# Altium PCB GRHV_Double_30v.PcbDoc
Units mil, origin at the board's own origin, x right, y up, seen from the top; angles counter-clockwise.
Board outline 4600 x 3780 mil, 2 copper layers (Top Layer, Bottom Layer); 83 components, 43 nets, 212 pads, 0 vias.
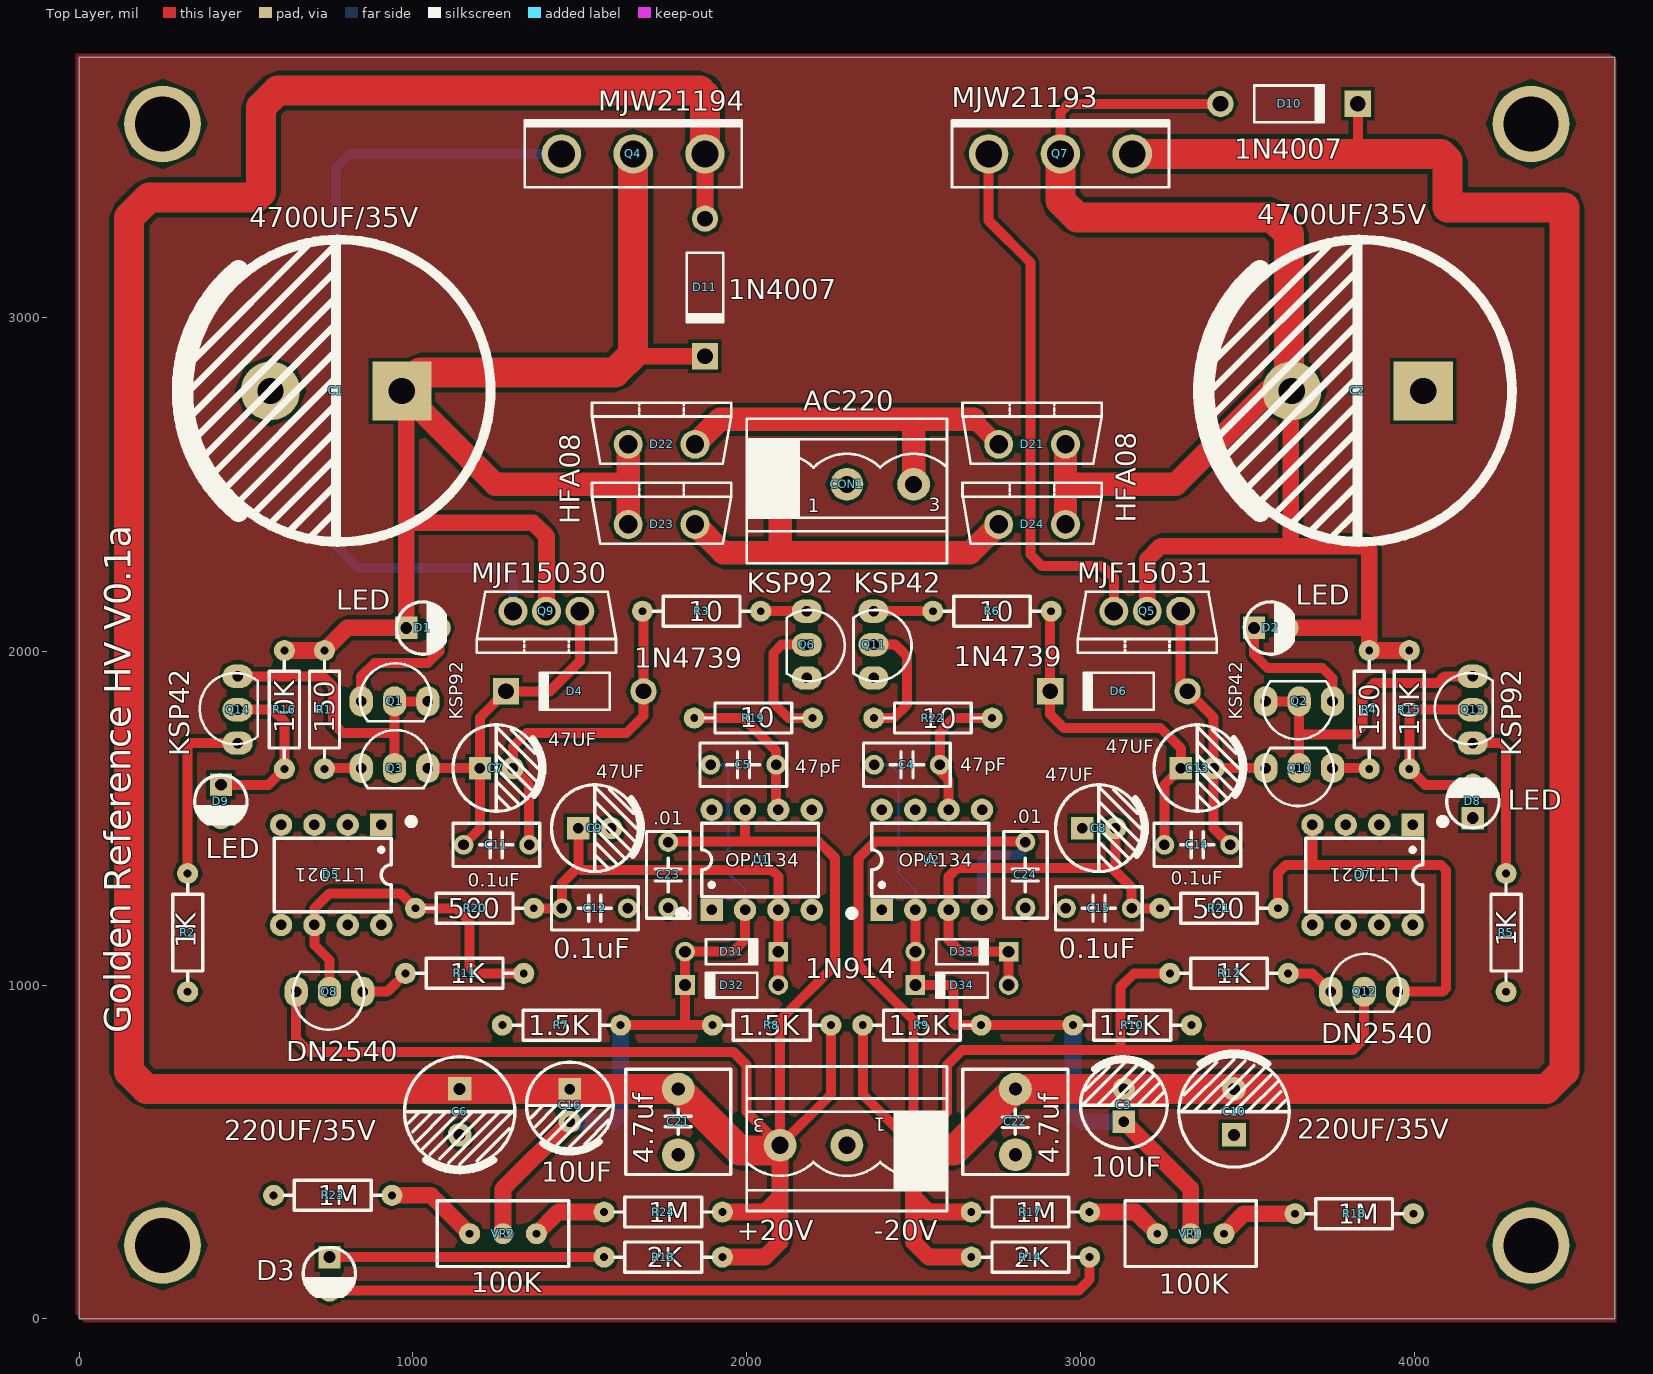
[diagram p0: Top Layer view]
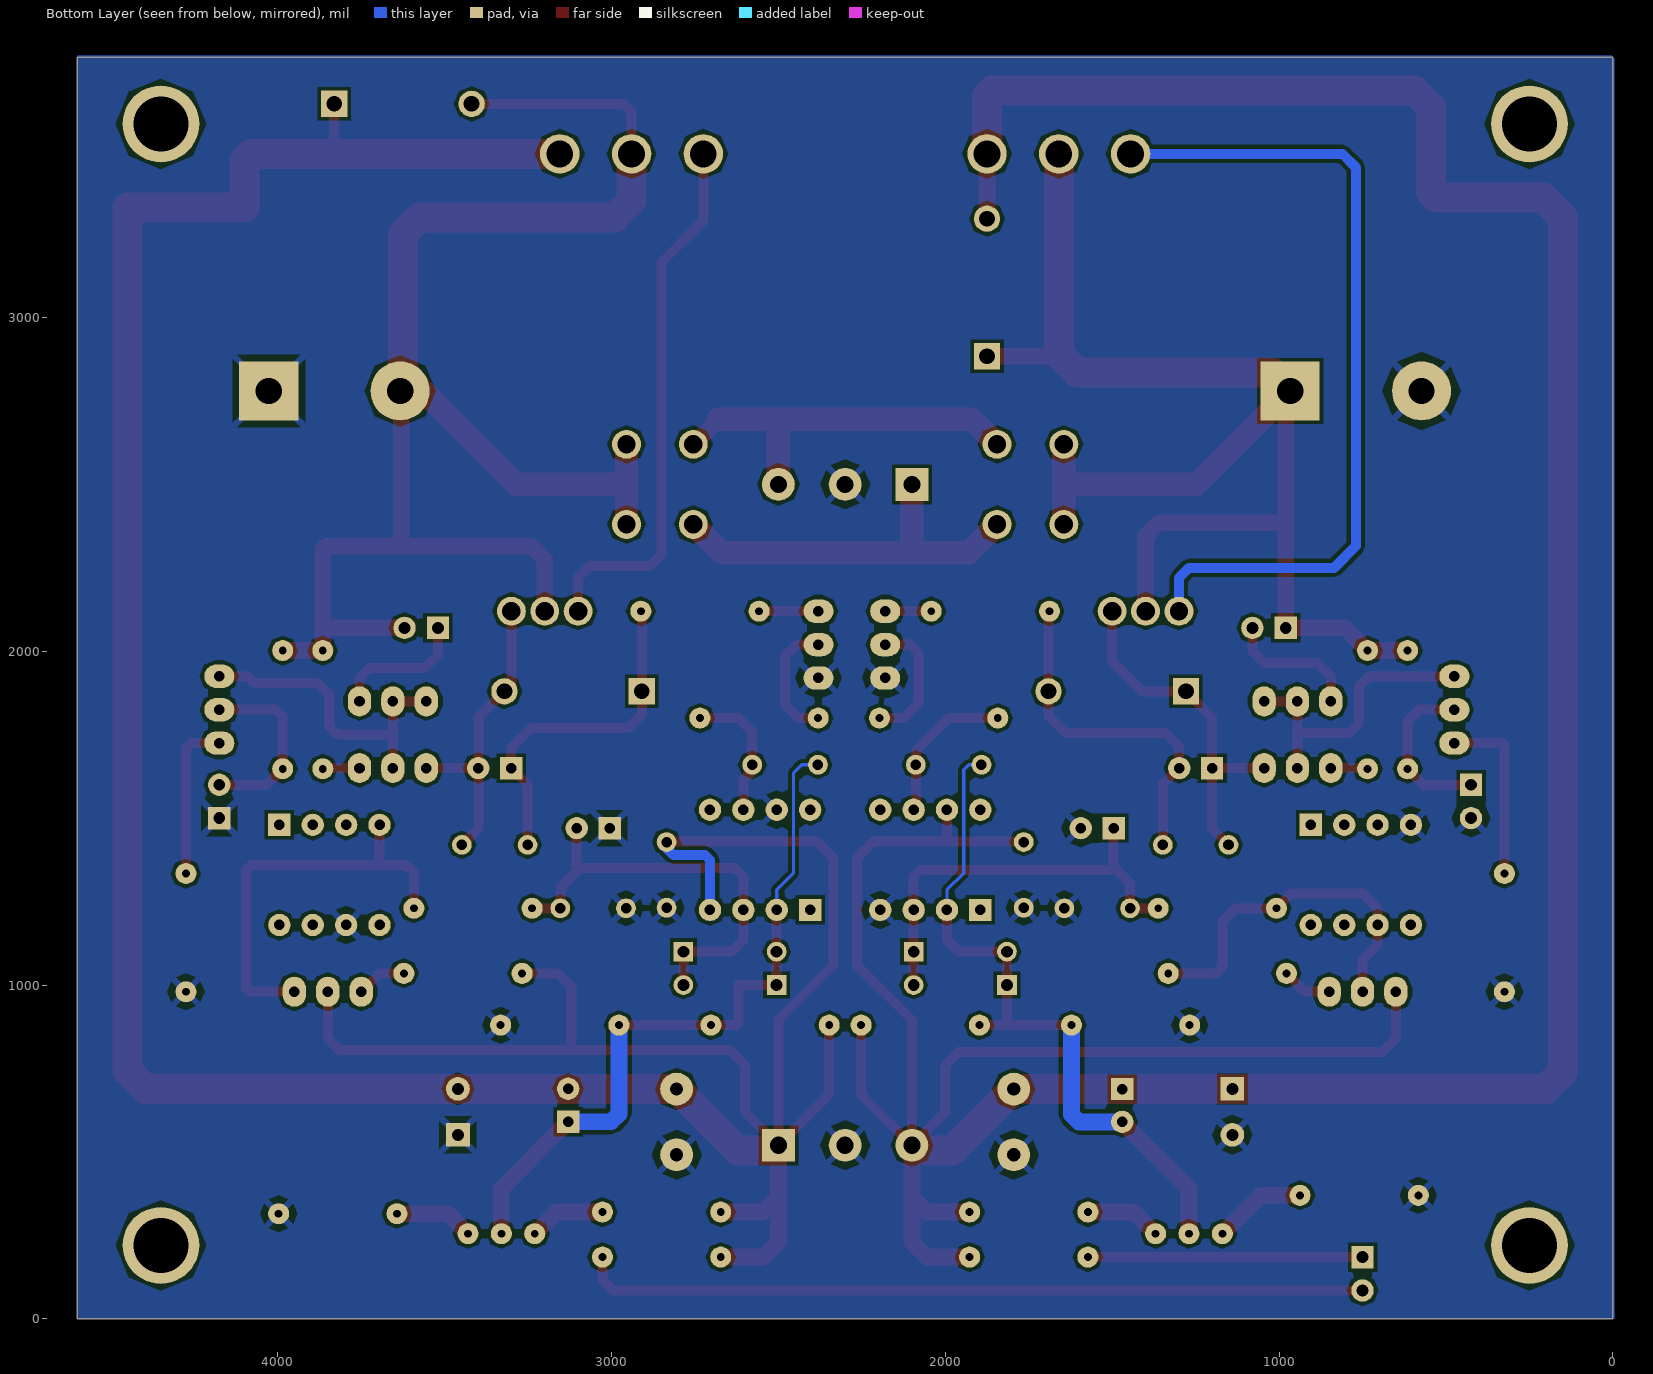
[diagram p1: Bottom Layer view, seen from below]

## Layer stack, top to bottom
Top Solder: solder mask 0.4, Solder Resist, Dk 3.5
Top Layer: signal copper 1.4
Dielectric 1: dielectric 12.6, FR-4, Dk 4.8
Bottom Layer: signal copper 1.4
Bottom Solder: solder mask 0.4, Solder Resist, Dk 3.5

## Board outline
0,0 4600,0 4600,3780 0,3780

## Design rules (kind name [scope] priority, off if disabled: settings)
Clearance [All] p1: gap=10 ignorepadtopadclearanceinfootprint=FALSE except(0: Arc-Hole Track-Hole SMDPad-Hole THPad-Hole Via-Hole Fill-Hole Poly-Hole Region-Hole Text-Hole)
PlaneClearance [All] p1: clearance=30
PlaneConnect [All] p1: planeconnectstyle=Relief reliefexpansion=20 reliefentries=4 reliefconductorwidth=20 reliefairgap=30
PolygonConnect [All] p1: thpad.connectstyle=Relief thpad.reliefconductorwidth=20 thpad.reliefentries=4 thpad.polygonreliefangle="45 Angle" thpad.airgapwidth=20 smdpad.connectstyle=Relief smdpad.reliefconductorwidth=20 smdpad.reliefentries=4 smdpad.polygonreliefangle="90 Angle" smdpad.airgapwidth=20 via.connectstyle=Relief via.reliefconductorwidth=20 via.reliefentries=4 via.polygonreliefangle="45 Angle" via.airgapwidth=20
RoomDefinition GRHV_double_30v [InComponentClass('GRHV_double_30v')] p1: confinementstyle=ConfineIn formatcopy=TRUE lockcomponents=FALSE outline 5480,-80 25630,-80 25630,970 5480,970
RoutingVias [All] p1: holewidth=28 width=50 viastyle="Through Hole" minholewidth=28 minwidth=50 maxholewidth=28 maxwidth=50
SolderMaskExpansion [All] p1: expansion=4
Width [All] p1: maxlimit=100 minlimit=10 preferedwidth=90
28 further rules are at their usual default settings.

## Components (designator, comment, footprint, x,y, rotation, side; value= is the part's Value field where it differs from the comment)
-20V "+20V" HX5.08-3L 2500,520 r180 top (schematic designator CON2)
C1 "4700UF/35V" "CAP 10*22*40" 770,2780 r180 top
C2 "4700UF/35V" "CAP 10*22*40" 3830,2780 r180 top
C3 "10UF" "CAP 2.5*6.3*7" 3130,640 r90 top
C4 "47pF" "CBB 6.3*6.3*5" 2480,1660 r180 top
C5 "47pF" "CBB 6.3*6.3*5" 1990,1660 r180 top
C6 "220UF/35V" "CAP 3.5*8*11.5" 1140,620 r270 top
C7 "47UF" "CAP 2.5*6.3*11.2" 1250,1650 r0 top
C8 "47UF" "CAP 2.5*6.3*11.2" 3055,1470 r0 top
C9 "47UF" "CAP 2.5*6.3*11.2" 1545,1470 r0 top
C10 "220UF/35V" "CAP 3.5*8*11.5" 3460,620 r90 top
C11 "0.1uF" "CBB 6.3*6.3*5" 1250,1420 r0 top
C12 "0.1uF" "CBB 6.3*6.3*5" 1545,1230 r0 top
C13 "47UF" "CAP 2.5*6.3*11.2" 3350,1650 r0 top
C14 "0.1uF" "CBB 6.3*6.3*5" 3350,1420 r0 top
C15 "0.1uF" "CBB 6.3*6.3*5" 3055,1230 r180 top
C16 "10UF" "CAP 2.5*6.3*7" 1470,639.21 r270 top
C21 "4.7uf" "CBB 7.2*7.2*13" 1795,590 r270 top
C22 "4.7uf" "CBB 7.2*7.2*13" 2805,590 r90 top
C23 ".01" "CBB 6.3*6.3*5" 1765,1330 r90 top value=0.01uF
C24 ".01" "CBB 6.3*6.3*5" 2835,1330 r90 top value=0.01uF
CON1 "AC220" HX5.08-3L 2100,2500 r0 top
D1 "LED" "LED 3MM-R" 1030,2070 r0 top
D2 "LED" "LED 3MM-R" 3570,2070 r0 top
D3 "ValueValueAux" "LED 3MM-R" 750,135 r270 top
D4 "1N4739" DO-41 1485,1880 r180 top
D5 "LT1021" DIP8-300_MH 755,1330 r270 top
D6 "1N4739" DO-41 3115,1880 r180 top
D7 "LT1021" DIP8-300_MH 3845,1330 r270 top
D8 "LED" "LED 3MM-R" 4175,1550 r90 top
D9 "LED" "LED 3MM-R" 425,1550 r270 top
D10 "1N4007" DO-41 3625,3640 r0 top
D11 "1N4007" DO-41 1875,3090 r270 top
D21 "HFA08" TO220AC 2755,2620 r0 top
D22 "HFA08" TO220AC 1645,2620 r0 top
D23 "HFA08" TO220AC 1645,2380 r0 top
D24 "HFA08" TO220AC 2755,2380 r0 top
D31 "1N914" DO-35 1955,1100 r0 top
D32 "1N914" DO-35 1955,1000 r180 top
D33 "1N914" DO-35 2645,1100 r0 top
D34 "1N914" DO-35 2645,1000 r180 top
Q1 "KSP92" TO92A 845,1850 r90 top
Q2 "KSP42" TO92A 3755,1850 r270 top
Q3 "KSP92" TO92A 845,1650 r90 top
Q4 "MJW21194" TO247V 1445,3490 r0 top
Q5 "MJF15031" TO220V 3300,2120 r180 top
Q6 "KSP92" TO92A 2180,2120 r0 top
Q7 "MJW21193" TO247V 2725,3490 r0 top
Q8 "DN2540" TO92A 850,980 r270 top
Q9 "MJF15030" TO220V 1500,2120 r180 top
Q10 "KSP42" TO92A 3755,1650 r270 top
Q11 "KSP42" TO92A 2380,2120 r0 top
Q12 "DN2540" TO92A 3750,980 r90 top
Q13 "KSP92" TO92A 4175,1725 r180 top
Q14 "KSP42" TO92A 475,1725 r180 top
R1 "150" "RS 1/4W" 735,1825 r270 top
R2 "1K" "RS 1/4W" 325,1157 r270 top
R3 "10" "RS 1/4W" 1865,2120 r0 top
R4 "150" "RS 1/4W" 3865,1825 r90 top
R5 "1K" "RS 1/4W" 4275,1157 r90 top
R6 "10" "RS 1/4W" 2735,2120 r0 top
R7 "1.5K" "RS 1/4W" 1445,880 r180 top
R8 "1.5K" "RS 1/4W" 2075,880 r180 top
R9 "1.5K" "RS 1/4W" 2525,880 r180 top
R10 "1.5K" "RS 1/4W" 3155,880 r180 top
R11 "1K" "RS 1/4W" 1155,1035 r0 top
R12 "1K" "RS 1/4W" 3445,1035 r180 top
R13 "2K" "RS 1/4W" 1750,185 r0 top
R14 "2K" "RS 1/4W" 2850,185 r180 top
R15 "10K" "RS 1/4W" 3985,1825 r90 top
R16 "10K" "RS 1/4W" 615,1825 r270 top
R17 "1M" "RS 1/4W" 2850,320 r180 top
R18 "1M" "RS 1/4W" 3820,315 r180 top
R19 "10" "RS 1/4W" 2020,1800 r180 top
R20 "500" "RS 1/4W" 1185,1230 r180 top
R21 "500" "RS 1/4W" 3415,1230 r0 top
R22 "10" "RS 1/4W" 2558,1800 r0 top
R23 "1M" "RS 1/4W" 760,370 r180 top
R24 "1M" "RS 1/4W" 1750,320 r180 top
U1 "OPA134" DIP8-300_MH 2045,1375 r90 top
U2 "OPA134" DIP8-300_MH 2555,1375 r90 top
VR1 "100K" "RS 1/2W-VR" 3330,255 r180 top
VR2 "100K" "RS 1/2W-VR" 1270,255 r180 top

## Footprints (in the part's own frame and the unit in brackets; to place one, negate y for a bottom-side part, rotate by r counter-clockwise, add the part's x,y. Pads: shape width x height; smd on the part's side, far side on the other; paste and mask are expansions set on the pad)
"CAP 2.5*6.3*7" [mm] "脚距2.5mm直径6.3mm高度7mm"
  rect 1.7x1.7 hole 0.8: 1(-1.25,0)
  round 1.7 hole 0.8: 2(1.25,0)
  silkscreen extent -3.3,-3.3 3.56,3.3, body extent -3.15,-3.15 3.16,3.15, height 7.03
"CAP 2.5*6.3*11.2" [mm] "脚距2.5mm直径6.3mm高度11.2mm"
  rect 1.7x1.7 hole 0.8: 1(-1.25,0)
  round 1.7 hole 0.8: 2(1.25,0)
  silkscreen extent -3.3,-3.3 3.56,3.3, body extent -3.15,-3.15 3.16,3.15, height 11.23
"CAP 3.5*8*11.5" [mm] "脚距3.5mm直径8mm高度11.5mm"
  rect 1.8x1.8 hole 0.9: 1(-1.75,0)
  round 1.8 hole 0.9: 2(1.75,0)
  silkscreen extent -4.2,-4.2 4.5,4.2, body extent -4,-4 4.01,4, height 11.53
"CAP 10*22*40" [mm] "脚距10mm直径22mm高度40mm"
  rect 4.5x4.5 hole 2: 1(-5,0)
  round 4.5 hole 2: 2(5,0)
  silkscreen extent -11.75,-11.51 11.74,11.49, body extent -11,-11 11.01,11, height 40.03
"CBB 6.3*6.3*5" [mm] "脚距5mm高6.3mm厚3mm"
  round 1.5 hole 0.8: 1(-2.5,0) 2(2.5,0)
  silkscreen extent -3.3,-1.65 3.3,1.65, body extent -3.15,-1.5 3.15,1.5, height 6.8
"CBB 7.2*7.2*13" [mm] "脚距5mm高13mm厚7.2mm"
  round 2.5 hole 1: 1(-2.5,0) 2(2.5,0)
  silkscreen extent -4,-4 4,4, body extent -4,-4 4,4, height 17.53
DIP8-300_MH [mm] "带底座 9.4*7.6*3.8(长宽高）"
  rect 1.7x1.7 hole 0.8: 1(-3.81,3.81)
  round 1.7 hole 0.8: 2(-3.81,1.27) 3(-3.81,-1.27) 4(-3.81,-3.81) 5(3.81,-3.81) 6(3.81,-1.27) 7(3.81,1.27) 8(3.81,3.81)
  silkscreen extent -4.32,-4.32 2.79,6.35, body extent -5,-5.19 5,5.19, height 7.7
DO-35 [mm] "Diode, Axial; Body 3.8 x 1.9 mm (LxDia. max), Lead Dia. 0.53 mm (max)"
  round 1.5 hole 0.9: 1(-3.55,0)
  rect 1.5x1.5 hole 0.9: 2(3.55,0)
  silkscreen extent -1.95,-0.95 2.05,0.95
DO-41 [mm] "Diode, Axial; Body 5.2 x 2.7 mm (LxDia. max), Lead Dia. 0.86 mm (max)"
  round 2 hole 1.2: 1(-5.23,0)
  rect 2x2 hole 1.2: 2(5.23,0)
  silkscreen extent -2.65,-1.4 2.75,1.4
HX5.08-3L [mm]
  rect 2.5x2.5 hole 1.3: 1(0,0)
  round 2.5 hole 1.3: 2(5.08,0) 3(10.16,0)
  silkscreen extent -2.54,-6 12.7,5, body extent -2.5,-5.5 12.5,2.5, height 11
"LED 3MM-R" [mm] "红色3mm直插LED"
  rect 1.7x1.7 hole 0.9: 1(-1.27,0)
  round 1.7 hole 0.9: 2(1.27,0)
  silkscreen extent -2.01,-2 1.72,1.98, body extent -1.95,-1.95 1.64,1.95, height 5.55
"RS 1/2W-VR" [mm] "直插3脚顶调可调电阻，脚距2.54mm，长10mm*宽5mm*高10mm"
  round 1.6 hole 0.6: 1(-2.54,0) 2(2.54,0) 3(0,0)
  silkscreen extent -5,-2.5 5,2.5
"RS 1/4W" [mm] "直插色环电阻，脚距9mm，直径2.3mm"
  round 1.6 hole 0.6: 1(-4.5,0) 2(4.5,0)
  silkscreen extent -3.68,-1.14 3.68,1.14, body extent -4.72,-1.16 4.73,1.16, height 2.32
TO92A [mil]
  oval 90x70 hole 31.5: 1(0,0) 2(0,-100) 3(0,-200)
  silkscreen extent -60,-209 114,4
TO220AC [mm]
  round 2.2 hole 1.397: 1(0,0) 2(5.08,0)
  silkscreen extent -2.75,-1.48 7.83,3.17
TO220V [mm]
  round 2.2 hole 1.397: 1(0,0) 2(2.54,0) 3(5.08,0)
  silkscreen extent -2.75,-1.48 7.83,3.18
TO247V [mm]
  round 3 hole 2.032: 1(0,0) 2(5.461,0) 3(10.922,0)
  silkscreen extent -2.79,-2.54 13.72,2.54

## Part data
-20V: library part EDG5.08-3P
C1 C2 C3 C6 C7 C8 C9 C10 C13 C16: library part C-CAP, "直插电解电容", BOM名称=直插电解电容, 学习资源=www.ooocke.com, 版权归属=源创客
C4 C5 C11 C12 C14 C15 C23 C24: library part C-CBB, "CBB电容", BOM名称=CBB电容, 学习资源=www.ooocke.com, 版权归属=源创客
C21 C22: library part C-MKS, "MKS薄膜电容"
CON1: library part AC220-3
D1 D2 D8 D9: "直插式LED"
D3: library part LED, "直插式LED"
D4 D6: "9.1V/1W稳压管"
D5 D7: library part LT1021-10-2P, "10V Precision Reference 2 Pin Config"
D10 D11: "整流二极管", BOM名称=整流二极管, 学习资源=www.ooocke.com, 版权归属=源创客
D21 D22 D23 D24: library part VS-HFA08TB60-M3, "Ultrafast Soft Recovery Diado 8A 600V"
D31 D32 D33 D34: "高速开关管 1V/0.25W"
Q1 Q3 Q6 Q13: library part KSP92/93, "High Voltage PNP Transistor"
Q2 Q10 Q11 Q14: library part KSP42/43, "High Voltage NPN Transistor"
Q4 Q9: "Power NPN Transistor"
Q5 Q7: "Power PNP Transistor"
Q8 Q12: "N沟道耗尽型DMOS场效应管 400V/150ma"
R1 R2 R3 R4 R5 R6 R7 R8 R9 R10 R11 R12 R13 R14 R15 R16 R17 R18 R19 R20 R21 R22 R23 R24: library part R-CRR, "直插色环电阻", BOM名称=色环电阻, 学习资源=www.ooocke.com, 版权归属=源创客
U1 U2: library part OPA134PA
VR1 VR2: library part VR-W, "直插可调电阻-顶调"

## Free pads (board coordinates)
  round 230 hole 165: 2(250,220) 2(250,3580) 2(4350,220) 2(4350,3580)

## Nets (pads, with @x,y where several pads share a name; then routed paths per layer and width w, separated by ;. In a path a pad name is that pad's centre, name@x,y a point inside that pad or via, vN(x,y) a via of type N, cw(c..) or ccw(c..) an arc to the next point about the centre after c; other vN are vias at no path point)
GND: -20V.2 C1.2 C2.1 C6.2 C8.1 C9.2 C10.1 C12.2 C15.2 C21.2 C22.1 C23.1 C24.1 CON1.2 D5.4 D7.6 D8.1 D9.2 Q6.3 Q11.3 R2.2 R5.1 R7.2 R10.1 R18.1 R23.2 U1.4 U2.7
NetC1_1: C1.1 D1.1 D11.2 D22.1 D23.1 Q4.2 Q9.2 R1.1 R16.1 | length 4341.8
  Top Layer w50: R16.1 R1.1 802.83,2070 D1.1 980,2385 ; C1.1 980,2766.85 980,2385 ; Q9.2 1400,2345 1360,2385 980,2385 ; 1660,2890 1665.91,2884.09 D11.2
  Top Layer w70: C1.1@980,2766.85 1246.85,2500 1645,2500 ; D23.1 1645,2500 ; D22.1 1645,2500
  Top Layer w90: C1.1 1021.85,2835 1605,2835 1660,2890 Q4.2
NetC2_2: C2.2 D2.2 D10.1 D21.2 D24.2 Q5.2 Q7.2 R4.2 R15.2 | length 4961.5
  Top Layer w30: Q7.2 2940,3615 2965,3640 D10.1
  Top Layer w50: Q5.2 3200,2275 3240,2315 3630,2315 ; D2.2@3622.83,2067.17 D2.2 3865,2070 ; C2.2@3625,2788.15 3630,2783.15 3630,2780 3630,2315 ; R15.2 R4.2 3865,2070 ; 3630,2315 3855,2315 3865,2305 3865,2070
  Top Layer w70: D24.2 2955,2500 ; D21.2 2955,2500 ; C2.2@3630,2780 3565,2780 3285,2500 2955,2500
  Top Layer w90: Q7.2 2940,3350 2990,3300 3575,3300 3625,3250 C2.2@3625,2788.15
NetC3_1: C3.1 C4.2 D33.1 D34.2 R9.1 R10.2 U2.2 VR1.3 | length 2175.8
  Top Layer w30: U2.2 2505,1100.24 D33.1 D34.2 2620,1000 2620,885 2625,880 R9.1 R10.2
  Top Layer w50: C3.1 3330,390.79 VR1.3
  Bottom Layer w10: C4.2 2430,1660 2455,1635 2455,1335 2505,1285 U2.2
  Bottom Layer w50: R10.2 2977.83,613.74 3000.79,590.79 C3.1
NetC3_2: -20V.1 C3.2 C10.2 C22.2 C24.2 D10.2 Q7.3 Q12.2 R9.2 R12.2 R14.2 R17.2 U2.4 | length 11167.5
  Top Layer w30: R9.2 2347.83,672.17 -20V.1 ; C24.2 2833.43,1430 2385,1430 2335,1380 2335,1060 2500,895 -20V.1 ; R12.2 3160,1035 3120,995 3120,805 ; 3830,3490 3830.91,3490.91 D10.2 ; Q12.2 3850,840 3815,805 3120,805 ; -20V.1 2600,620 2600,760 2645,805 3120,805
  Top Layer w50: -20V.1@2525,495 2515,505 -20V.1 2500,365 ; R14.2 2545,185 2500,230 2500,365 ; R17.2 2545,320 2500,365
  Top Layer w90: -20V.1@2515,505 2621.57,505 C22.2 2805.79,689.21 C3.2 3130.31,688.9 C10.2 4396.1,688.9 4450,742.8 4450,3330 4100,3330 4100,3470 4080,3490 3830,3490 Q7.3
  Bottom Layer w30: U2.4 2705,1375 2720,1390 2815,1390 2835,1410 C24.2
NetC4_1: C4.1 R22.2 U2.6 | length 418.4
  Top Layer w30: U2.6 2605,1615 2578.43,1641.57 C4.1 2578.43,1758.43 2620,1800 R22.2
NetC5_1: C5.1 R19.2 U1.6 | length 465.7
  Top Layer w30: R19.2 1990,1800 2088.43,1701.57 C5.1 2088.43,1531.57 U1.6
NetC5_2: C5.2 C16.2 D31.1 D32.2 R7.1 R8.2 U1.2 VR2.3 | length 2127.4
  Top Layer w30: R7.1 1815,880 ; R8.2 1815,880 ; U1.2 1995,1135 1960,1100 D31.1 D32.2 1815.24,880.24 1815,880
  Top Layer w50: VR2.3 1270,390 C16.2
  Bottom Layer w10: C5.2 1930,1660 1945,1645 1945,1335 1995,1285 U1.2
  Bottom Layer w50: C16.2 1600,590 1622.17,612.17 R7.1
NetC6_1: -20V.3 C6.1 C16.1 C21.1 C23.2 D11.1 Q4.3 Q8.3 R8.1 R13.2 R24.1 U1.7 | length 11467.6
  Top Layer w30: Q8.3 650,840 690,800 1960,800 2000,760 2000,620 -20V.3 ; C23.2 1766.57,1430 1990.79,1430 ; U1.7 1995,1434.21 1990.79,1430 ; R8.1 2252.17,672.17 -20V.3 ; 1990.79,1430 2215,1430 2265,1380 2265,1060 2100,895 -20V.3
  Top Layer w50: D11.1 Q4.3 ; R13.2 2055,185 2100,230 2100,365 ; R24.1 2055,320 2100,365 ; -20V.3 2100,365
  Top Layer w90: Q4.3 1875,3665 1860,3680 595,3680 545,3630 545,3375 530,3360 210,3360 150,3300 150,740 201.1,688.9 C6.1 1469.53,688.9 C16.1 C21.1 1978.43,505 2085,505 -20V.3
NetC7_1: C7.1 C11.1 D4.2 Q3.3 Q9.1 | length 1076.8
  Top Layer w30: Q3.3 C7.1 ; C11.1 1200.79,1469.21 C7.1 ; Q9.1 1500,1970 1410,1880 D4.2 1200.79,1801.69 C7.1
NetC7_2: C7.2 C11.2 D4.1 R3.1 | length 1059.6
  Top Layer w30: C11.2 1348.43,1600.79 C7.2 1300,1650.79 1300,1715 1340,1755 1640,1755 1690.91,1805.91 D4.1 1690.91,2116.93 R3.1
NetC8_2: C8.2 C15.1 D33.2 D34.1 R21.1 U2.3 | length 1337
  Top Layer w30: D34.1 D33.2 2640,1100 2605,1135 U2.3 2605,1325 2630,1350 3095,1350 ; C8.2 3104.21,1359.21 3095,1350 ; R21.1 C15.1 3153.43,1291.57 3095,1350
NetC9_1: C9.1 C12.1 D31.2 D32.1 R20.1 U1.3 | length 1281.2
  Top Layer w30: R20.1 C12.1 1446.57,1305 1495.79,1354.21 ; C9.1 1495.79,1354.21 ; D32.1 D31.2 2095,1100.24 U1.3 2095,1325 2075,1345 1505,1345 1495.79,1354.21
NetC13_1: C13.1 C14.1 D6.2 R6.2 | length 1053.8
  Top Layer w30: R6.2 2909.09,2116.93 D6.2 2909.09,1810.91 2950,1770 3240,1770 3300.79,1709.21 C13.1 3251.57,1600.79 C14.1
NetC13_2: C13.2 C14.2 D6.1 Q5.1 Q10.3 | length 917.3
  Top Layer w30: Q5.1 3300,1900.91 D6.1 3399.21,1801.69 C13.2 ; C14.2 3399.21,1469.21 C13.2 ; Q10.3 C13.2
NetCON1_1: CON1.1 D23.2 D24.1 | length 1185.4
  Top Layer w70: D23.2 1930,2295 2100,2295 ; CON1.1 2100,2295 ; D24.1 2670,2295 2100,2295
NetCON1_3: CON1.3 D21.1 D22.2 | length 1169.2
  Top Layer w50: 2495,2695 2500,2690 ; 2680,2695 D21.1
  Top Layer w70: D22.2 1920,2695 2495,2695 2680,2695 ; CON1.3 2500,2690
NetD1_2: D1.2 Q1.1 | length 411.1
  Top Layer w30: Q1.1 845,1925 885,1965 1045,1965 1080,2000 D1.2
NetD2_1: D2.1 Q2.1 | length 414
  Top Layer w30: D2.1 3520,1990 3560,1950 3725,1950 3755,1920 Q2.1
NetD3_1: D3.1 R13.1 | length 822.8
  Top Layer w30: D3.1 R13.1
NetD3_2: D3.2 R14.1 | length 2358.3
  Top Layer w30: D3.2 2995,85 3027.17,117.17 R14.1
NetD5_6: D5.6 Q8.2 R11.2 R20.2 | length 1092.9
  Top Layer w30: Q8.2 750,1075 705,1120 D5.6 705,1230 750,1275 962.83,1275 R20.2 1130,1230 1170,1190 1170,1055 1190,1035 R11.2
NetD7_4: D7.4 Q12.3 R21.2 | length 1251.9
  Top Layer w30: R21.2 3592.17,1337.17 3615,1360 3690,1360 ; D7.4 3695,1365 3690,1360 ; Q12.3 4085,980 4095,990 4095,1345 4080,1360 3690,1360
NetD8_2: D8.2 Q13.2 R15.1 | length 565.3
  Top Layer w30: D8.2 4032.83,1600 R15.1 3985,1805 4005,1825 Q13.2
NetD9_1: D9.1 Q14.2 R16.2 | length 506.5
  Top Layer w30: D9.1 567.17,1600 R16.2 615,1790 580,1825 Q14.2
NetQ1_2: Q1.2 Q1.3 Q3.2 Q14.3 | length 904.9
  Top Layer w30: Q14.3 730,1925 760,1895 760,1785 790,1755 945,1755 ; Q3.2 945,1755 ; Q1.3 Q1.2 945,1755
NetQ2_2: Q2.2 Q2.3 Q10.2 Q13.3 | length 948.1
  Top Layer w30: Q2.3 Q2.2 3655,1750 ; Q10.2 3655,1750 ; Q13.3 4090,1925 4070,1905 3880,1905 3845,1870 3845,1775 3820,1750 3655,1750
NetQ3_1: Q3.1 R1.2 | length 110.9
  Top Layer w30: R1.2 737.17,1650 Q3.1
NetQ4_1: Q4.1 Q9.3 | length 2495.9
  Bottom Layer w30: Q9.3 1300,2220 1270,2250 835,2250 770,2315 770,3450 810,3490 Q4.1
NetQ5_3: Q5.3 Q7.1 | length 1630.8
  Top Layer w30: Q7.1 2725,3290 2850,3165 2850,2290 2885,2255 3065,2255 3100,2220 Q5.3
NetQ6_1: Q6.1 R3.2 | length 137.8
  Top Layer w30: R3.2 Q6.1
NetQ6_2: Q6.2 R19.1 | length 396.2
  Top Layer w30: Q6.2 2105,2020 2080,1995 2080,1845 2125,1800 R19.1
NetQ8_1: Q8.1 R11.1 | length 150.6
  Top Layer w30: Q8.1 922.83,980 R11.1
NetQ10_1: Q10.1 R4.1 | length 110.9
  Top Layer w30: Q10.1 3862.83,1650 R4.1
NetQ11_1: Q11.1 R6.1 | length 177.8
  Top Layer w30: Q11.1 R6.1
NetQ11_2: Q11.2 R22.1 | length 375.2
  Top Layer w30: Q11.2 2445,2020 2480,1985 2480,1840 2440,1800 R22.1
NetQ12_1: Q12.1 R12.1 | length 150.6
  Top Layer w30: R12.1 3695,1035 Q12.1
NetQ13_1: Q13.1 R5.2 | length 482
  Top Layer w30: Q13.1 4260,1725 4275,1710 R5.2
NetQ14_1: Q14.1 R2.1 | length 545
  Top Layer w30: R2.1@330,1339.17 R2.1 325,1720 330,1725 Q14.1
NetR17_1: R17.1 VR1.2 | length 229.8
  Top Layer w50: R17.1 3165,320 VR1.2
NetR18_2: R18.2 VR1.1 | length 237.7
  Top Layer w50: VR1.1 3490,315 R18.2
NetR23_1: R23.1 VR2.2 | length 280.5
  Top Layer w50: R23.1 1055,370 VR2.2
NetR24_2: R24.2 VR2.1 | length 229.8
  Top Layer w50: VR2.1 1435,320 R24.2
pads on no net: D5.1 D5.2 D5.3 D5.5 D5.7 D5.8 D7.1 D7.2 D7.3 D7.5 D7.7 D7.8 U1.1 U1.5 U1.8 U2.1 U2.5 U2.8

## Polygon pours and split planes (outlines as drawn)
no net on Top Layer "Top Layer-No Net" (solid, pour order 6): 15,-10 4605,-10 4605,3770 4585,3790 -10,3790 -10,15
GND on Bottom Layer "Top Layer-No Net" (solid, pour order 4): 4605,-5 4600,0 4600,3785 5,3785 -5,3775 -5,0 4595,0 4600,-5

## Silkscreen, mask and mechanical layers (free items; w line width, h text height)
Top Overlay:
  text "Golden Reference HV V0.1a" at 155,855 h80 r90
Mechanical 1:
  the board outline again, w10
Drill Drawing:
  the board outline again, w10

## Text inside footprints (layer, text, board x,y; h text height)
-20V: Top Overlay "3" at 2054,600 h40 r180; Top Overlay "1" at 2417,603 h40 r180
CON1: Top Overlay "3" at 2546,2420 h40; Top Overlay "1" at 2183,2417 h40